# EAGLE board micromarquee (EAGLE 6.0)
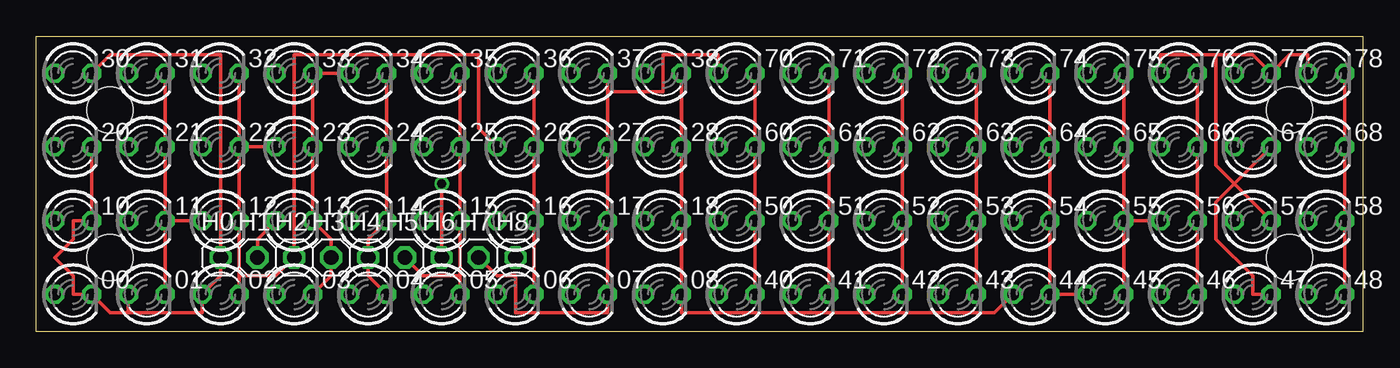
[diagram p0: board, top side]
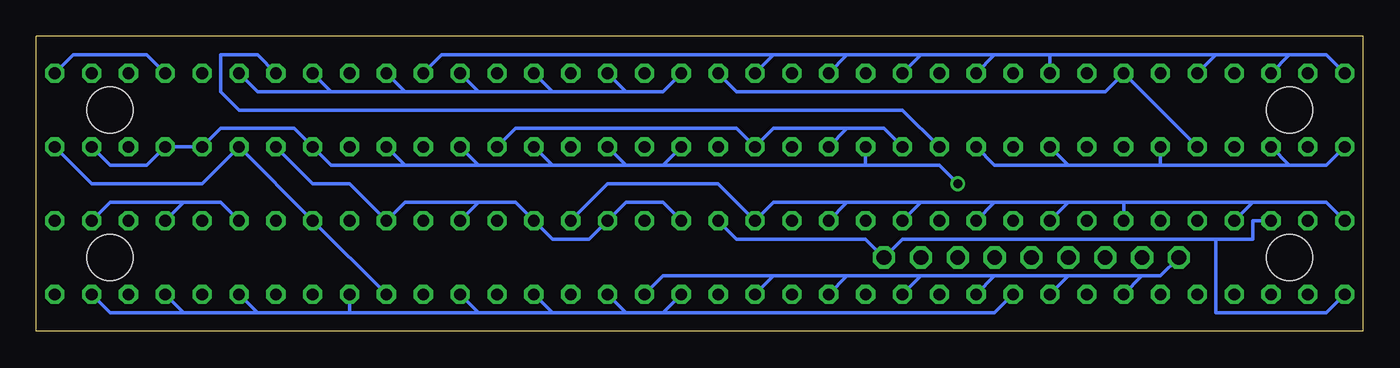
[diagram p1: board, bottom side, seen from below]

Size 91.44 x 20.32 mm. Coordinates in mm from the lower left corner, seen from the top.
Outline: 0,0 0,20.32 91.44,20.32 91.44,0 0,0
Copper layers (1*16): Top 0.035mm / dielectric 1.5mm / Bottom 0.035mm
Design rules: minimum track width 10mil, minimum drill 24mil, track to track 8mil, track to pad 8mil, pad to pad 8mil, via to via 8mil, smd to smd 8mil, copper to edge 40mil, drill to drill 8mil, minimum pad ring 10mil, minimum via ring 8mil, stop-mask expansion 4mil, vias tented up to drill 0mil, thermal gap 10mil
Holes 3.2 mm at 5.08,5.08 5.08,15.24 86.36,5.08 86.36,15.24

## Footprints (pad centres in the part's own frame; a part is rotated, then mirrored left to right if it is on the bottom)
LED3MM = drill 0.813 octagon: A -1.27,0; K 1.27,0
1X01 = drill 1.016 octagon: 1 0,0

## Placement (x,y rotation side)
00  [LED3MM]  2.54,2.54 0 top
01  [LED3MM]  7.62,2.54 0 top
02  [LED3MM]  12.7,2.54 0 top
03  [LED3MM]  17.78,2.54 0 top
04  [LED3MM]  22.86,2.54 0 top
05  [LED3MM]  27.94,2.54 0 top
06  [LED3MM]  33.02,2.54 0 top
07  [LED3MM]  38.1,2.54 0 top
08  [LED3MM]  43.18,2.54 0 top
10  [LED3MM]  2.54,7.62 0 top
11  [LED3MM]  7.62,7.62 0 top
12  [LED3MM]  12.7,7.62 0 top
13  [LED3MM]  17.78,7.62 0 top
14  [LED3MM]  22.86,7.62 0 top
15  [LED3MM]  27.94,7.62 0 top
16  [LED3MM]  33.02,7.62 0 top
17  [LED3MM]  38.1,7.62 0 top
18  [LED3MM]  43.18,7.62 0 top
20  [LED3MM]  2.54,12.7 0 top
21  [LED3MM]  7.62,12.7 0 top
22  [LED3MM]  12.7,12.7 0 top
23  [LED3MM]  17.78,12.7 0 top
24  [LED3MM]  22.86,12.7 0 top
25  [LED3MM]  27.94,12.7 0 top
26  [LED3MM]  33.02,12.7 0 top
27  [LED3MM]  38.1,12.7 0 top
28  [LED3MM]  43.18,12.7 0 top
30  [LED3MM]  2.54,17.78 0 top
31  [LED3MM]  7.62,17.78 0 top
32  [LED3MM]  12.7,17.78 0 top
33  [LED3MM]  17.78,17.78 0 top
34  [LED3MM]  22.86,17.78 0 top
35  [LED3MM]  27.94,17.78 0 top
36  [LED3MM]  33.02,17.78 0 top
37  [LED3MM]  38.1,17.78 0 top
38  [LED3MM]  43.18,17.78 0 top
40  [LED3MM]  48.26,2.54 0 top
41  [LED3MM]  53.34,2.54 0 top
42  [LED3MM]  58.42,2.54 0 top
43  [LED3MM]  63.5,2.54 0 top
44  [LED3MM]  68.58,2.54 0 top
45  [LED3MM]  73.66,2.54 0 top
46  [LED3MM]  78.74,2.54 0 top
47  [LED3MM]  83.82,2.54 0 top
48  [LED3MM]  88.9,2.54 0 top
50  [LED3MM]  48.26,7.62 0 top
51  [LED3MM]  53.34,7.62 0 top
52  [LED3MM]  58.42,7.62 0 top
53  [LED3MM]  63.5,7.62 0 top
54  [LED3MM]  68.58,7.62 0 top
55  [LED3MM]  73.66,7.62 0 top
56  [LED3MM]  78.74,7.62 0 top
57  [LED3MM]  83.82,7.62 0 top
58  [LED3MM]  88.9,7.62 0 top
60  [LED3MM]  48.26,12.7 0 top
61  [LED3MM]  53.34,12.7 0 top
62  [LED3MM]  58.42,12.7 0 top
63  [LED3MM]  63.5,12.7 0 top
64  [LED3MM]  68.58,12.7 0 top
65  [LED3MM]  73.66,12.7 0 top
66  [LED3MM]  78.74,12.7 0 top
67  [LED3MM]  83.82,12.7 0 top
68  [LED3MM]  88.9,12.7 0 top
70  [LED3MM]  48.26,17.78 0 top
71  [LED3MM]  53.34,17.78 0 top
72  [LED3MM]  58.42,17.78 0 top
73  [LED3MM]  63.5,17.78 0 top
74  [LED3MM]  68.58,17.78 0 top
75  [LED3MM]  73.66,17.78 0 top
76  [LED3MM]  78.74,17.78 0 top
77  [LED3MM]  83.82,17.78 0 top
78  [LED3MM]  88.9,17.78 0 top
H0  [1X01]  12.7,5.08 0 top
H1  [1X01]  15.24,5.08 0 top
H2  [1X01]  17.78,5.08 0 top
H3  [1X01]  20.32,5.08 0 top
H4  [1X01]  22.86,5.08 0 top
H5  [1X01]  25.4,5.08 0 top
H6  [1X01]  27.94,5.08 0 top
H7  [1X01]  30.48,5.08 0 top
H8  [1X01]  33.02,5.08 0 top

## Library data of the parts
00 01-08 10-18 20-28 30-38 40-48 50-58 60-68 70-78 = led
H0 H1-H8 = pinhead

## Nets
D: 00.A 08.K 11.A 18.K 22.A 28.K 33.A 38.K 44.A 48.K 55.A 58.K 66.A 68.K 77.A 78.K H8.1
S0: 00.K 01.A 02.A 03.A 04.A 05.A 06.A 07.A 08.A 10.K 20.K 30.K 40.K 50.K 60.K 70.K H0.1
S1: 01.K 10.A 11.K 12.A 13.A 14.A 15.A 16.A 17.A 18.A 21.K 31.K 41.K 51.K 61.K 71.K H1.1
S2: 02.K 12.K 20.A 21.A 22.K 23.A 24.A 25.A 26.A 27.A 28.A 32.K 42.K 52.K 62.K 72.K H2.1
S3: 03.K 13.K 23.K 30.A 31.A 32.A 33.K 34.A 35.A 36.A 37.A 38.A 43.K 53.K 63.K 73.K H3.1
S4: 04.K 14.K 24.K 34.K 40.A 41.A 42.A 43.A 44.K 45.A 46.A 47.A 48.A 54.K 64.K 74.K H4.1
S5: 05.K 15.K 25.K 35.K 45.K 50.A 51.A 52.A 53.A 54.A 55.K 56.A 57.A 58.A 65.K 75.K H5.1
S6: 06.K 16.K 26.K 36.K 46.K 56.K 60.A 61.A 62.A 63.A 64.A 65.A 66.K 67.A 68.A 76.K H6.1
S7: 07.K 17.K 27.K 37.K 47.K 57.K 67.K 70.A 71.A 72.A 73.A 74.A 75.A 76.A 77.K 78.A H7.1

## Tracks (layer width: path | path; a pad name or v marks a point on that pad's centre or on a via)
D
  Top 0.254: 48.K 58.K 68.K 78.K | 38.K 28.K 18.K 08.K 44.45,1.27 66.04,1.27 44.A
  Bottom 0.254: 44.A 55.A 66.A 80.01,10.16 87.63,10.16 68.K | 77.A 83.82,19.05 88.9,19.05 78.K | 00.A 2.54,1.27 10.16,1.27 10.16,6.35 | 10.16,6.35 7.62,6.35 7.62,7.62 11.A | 10.16,6.35 31.75,6.35 H8.1 34.29,6.35 43.18,6.35 18.K | 22.A 33.A 17.78,16.51 43.18,16.51 38.K
S0
  Top 0.254: 40.K 50.K 60.K 70.K | 20.K 10.K 2.54,7.62 2.54,6.35 1.27,5.08 2.54,3.81 2.54,2.54 00.K 5.08,1.27 6.35,1.27 | 01.A 6.35,1.27 | 30.K 5.08,19.05 12.7,19.05 H0.1 12.7,3.81 02.A 11.43,1.27 6.35,1.27
  Bottom 0.254: 15.24,3.81 03.A | 15.24,3.81 13.97,3.81 H0.1 | 20.32,3.81 04.A | 15.24,3.81 20.32,3.81 | 25.4,3.81 05.A | 20.32,3.81 25.4,3.81 | 30.48,3.81 06.A | 25.4,3.81 30.48,3.81 | 35.56,3.81 07.A | 30.48,3.81 35.56,3.81 | 40.64,3.81 08.A | 35.56,3.81 40.64,3.81 | 40.K 48.26,3.81 40.64,3.81
S1
  Top 0.254: 41.K 51.K 61.K 71.K | 31.K 21.K 11.K | 13.A 15.24,6.35 H1.1 | 11.K 01.K | 11.K 12.A
  Bottom 0.254: 10.A 2.54,8.89 7.62,8.89 | 11.K 7.62,8.89 | 20.32,8.89 14.A | 7.62,8.89 16.51,8.89 | 16.51,8.89 20.32,8.89 | 25.4,8.89 15.A | 20.32,8.89 25.4,8.89 | 30.48,8.89 16.A | 25.4,8.89 30.48,8.89 | 35.56,8.89 17.A | 30.48,8.89 35.56,8.89 | 35.56,8.89 40.64,8.89 18.A 44.45,10.16 52.07,10.16 51.K | 16.51,8.89 13.A
S2
  Top 0.254: 13.97,3.81 12.K 22.K | 13.97,3.81 02.K | 13.97,3.81 16.51,3.81 H2.1 17.78,19.05 30.48,19.05 30.48,13.97 26.A | 23.A 22.K | 22.K 32.K | 42.K 52.K 62.K 72.K
  Bottom 0.254: 20.A 2.54,11.43 5.08,11.43 | 21.A 5.08,11.43 | 20.32,11.43 24.A | 5.08,11.43 13.97,11.43 | 13.97,11.43 20.32,11.43 | 25.A 25.4,11.43 20.32,11.43 | 13.97,11.43 22.K | 26.A 33.02,13.97 35.56,13.97 | 27.A 35.56,13.97 | 35.56,13.97 40.64,13.97 28.A 43.18,13.97 58.42,13.97 62.K
S3
  Top 0.254: 03.K 20.32,3.81 H3.1 20.32,6.35 13.K 23.K 33.K 34.A | 43.K 53.K 63.K 73.K
  Bottom 0.254: 30.A 2.54,19.05 5.08,19.05 | 31.A 5.08,19.05 | 10.16,19.05 32.A | 5.08,19.05 10.16,19.05 | 25.4,19.05 35.A | 10.16,19.05 21.59,19.05 | 21.59,19.05 25.4,19.05 | 30.48,19.05 36.A | 25.4,19.05 30.48,19.05 | 35.56,19.05 37.A | 30.48,19.05 35.56,19.05 | 40.64,19.05 38.A | 35.56,19.05 40.64,19.05 | 73.K 63.5,19.05 40.64,19.05 | 21.59,19.05 34.A
S4
  Top 0.254: 34.K 24.K 14.K 22.86,6.35 H4.1 22.86,3.81 04.K | 74.K 64.K 54.K 44.K 45.A
  Bottom 0.254: 48.26,1.27 40.A | 50.8,1.27 48.26,1.27 | 41.A 50.8,1.27 | 55.88,1.27 42.A | 50.8,1.27 55.88,1.27 | 60.96,1.27 43.A | 55.88,1.27 60.96,1.27 | 76.2,1.27 46.A | 60.96,1.27 69.85,1.27 | 69.85,1.27 76.2,1.27 | 81.28,1.27 47.A | 76.2,1.27 81.28,1.27 | 48.A 86.36,1.27 81.28,1.27 | 69.85,1.27 44.K | 04.K 25.4,1.27 48.26,1.27
S5
  Top 0.254: 35.K 25.K 15.K 29.21,3.81 | 29.21,3.81 05.K | H5.1 26.67,3.81 29.21,3.81 | 75.K 65.K 55.K | 55.K 45.K | 55.K 56.A
  Bottom 0.254: 50.A 48.26,8.89 50.8,8.89 51.A 53.34,6.35 55.88,6.35 52.A 58.42,8.89 60.96,8.89 | 53.A 60.96,8.89 | 60.96,8.89 66.04,8.89 54.A 69.85,10.16 72.39,10.16 65.K | 81.28,8.89 57.A | 81.28,8.89 78.74,8.89 56.A | 58.A 86.36,8.89 81.28,8.89 | 25.K 31.75,15.24 77.47,15.24 78.74,16.51 78.74,19.05 76.2,19.05 75.K
S6  (via drill 0.61)
  Top 0.254: 46.K 56.K 66.K 76.K | 06.K 16.K 26.K 36.K | v27.94,10.16 H6.1
  Bottom 0.254: 68.A 86.36,11.43 83.82,11.43 67.A 66.K 78.74,13.97 73.66,13.97 65.A 71.12,11.43 66.04,11.43 | 48.26,11.43 60.A | 50.8,11.43 48.26,11.43 | 61.A 50.8,11.43 | 55.88,11.43 62.A | 50.8,11.43 55.88,11.43 | 60.96,11.43 63.A | 55.88,11.43 60.96,11.43 | 66.04,11.43 64.A | 60.96,11.43 66.04,11.43 | v27.94,10.16 29.21,11.43 34.29,11.43 | 48.26,11.43 34.29,11.43 | 34.29,11.43 26.K
S7
  Top 0.254: 37.K 39.37,16.51 | 39.37,16.51 27.K 17.K 07.K 39.37,1.27 33.02,1.27 33.02,3.81 31.75,3.81 H7.1 | 47.K 83.82,2.54 83.82,3.81 81.28,6.35 81.28,8.89 82.55,10.16 | 67.K 82.55,10.16 | 82.55,10.16 57.K | 78.A 87.63,19.05 86.36,19.05 77.K 83.82,19.05 81.28,19.05 | 81.28,19.05 77.47,19.05 76.A | 82.55,10.16 81.28,11.43 81.28,19.05 | 39.37,16.51 43.18,16.51 43.18,19.05 46.99,19.05 70.A
  Bottom 0.254: 70.A 48.26,16.51 50.8,16.51 | 71.A 50.8,16.51 | 55.88,16.51 72.A | 50.8,16.51 55.88,16.51 | 60.96,16.51 73.A | 55.88,16.51 60.96,16.51 | 66.04,16.51 74.A | 60.96,16.51 66.04,16.51 | 71.12,16.51 75.A | 66.04,16.51 71.12,16.51 | 76.A 76.2,16.51 71.12,16.51